# Altium PCB Mega16_SMT.PcbDoc (part 2 of 2)
Units mil, origin at the board's own origin, x right, y up, seen from the top; angles counter-clockwise.
Board outline 3000 x 4260 mil, 2 copper layers (Top Layer, Bottom Layer); 58 components, 55 nets, 251 pads, 26 vias.
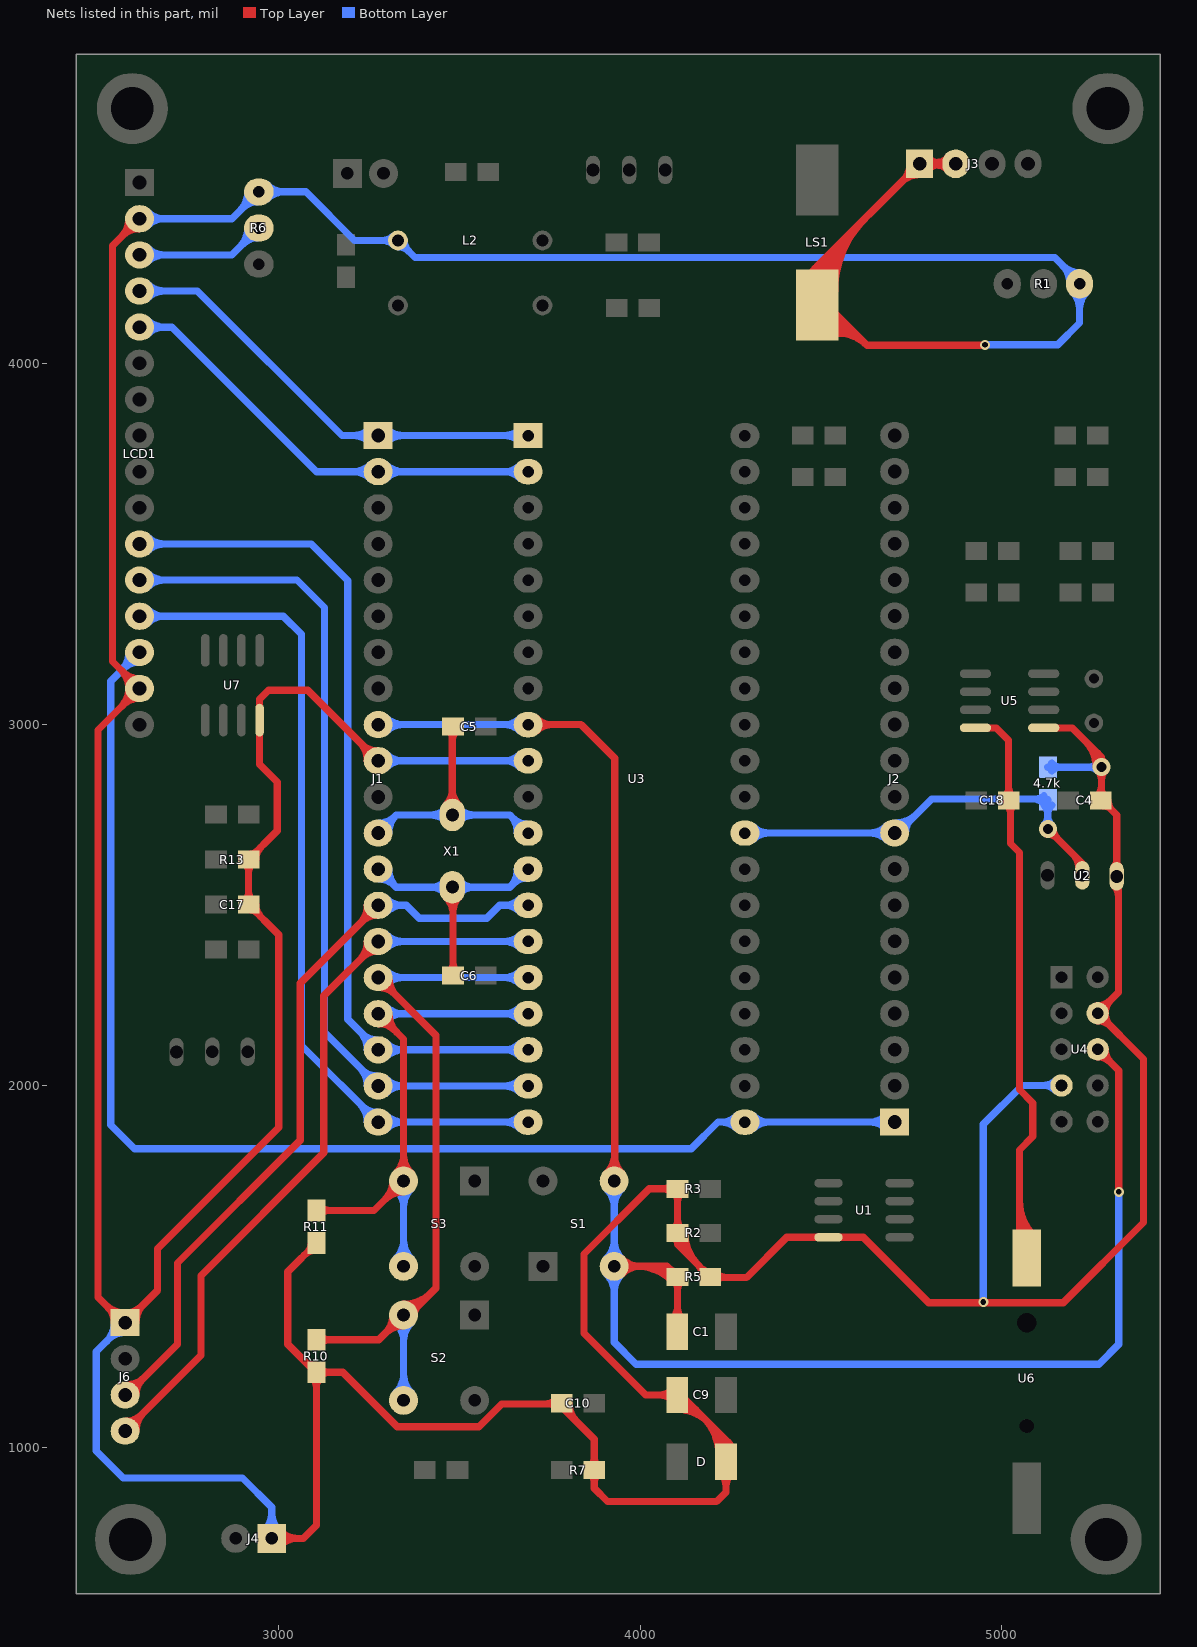
[diagram p2: the nets of this part, all layers, seen from the top]

## Via types
v1: diameter 28, hole 16, Top Layer to Bottom Layer, 22 vias
v2: diameter 50, hole 28, Top Layer to Bottom Layer, tented both sides, 2 vias
v3: diameter 50, hole 30, Top Layer to Bottom Layer, 2 vias

## Nets (pads, with @x,y where several pads share a name; then routed paths per layer and width w, separated by ;. In a path a pad name is that pad's centre, name@x,y a point inside that pad or via, vN(x,y) a via of type N, cw(c..) or ccw(c..) an arc to the next point about the centre after c; other vN are vias at no path point) (continued)
PC7: 4.7k.1 J2.9 U2.2 U3.29 | length 1699.1
  Top Layer w20: v2@5128.6,2696.4 cw(c5128.6,2660.19) 5154.21,2685.79 cw(c5179.81,2711.4) v2@5143.6,2711.4 ; v2(5128.6,2711.4) 5224,2616 U2.2@5224,2583 ; 5198.05,2641.95 cw(c5158.79,2602.68) U2.2@5214.31,2602.68
  Bottom Layer w20: U3.29@4290.37,2700 J2.9@4704.64,2700 ; U3.29@4313.05,2682.32 cw(c4355.73,2639.64) 4355.73,2700 cw(c4355.73,2760.36) U3.29@4313.05,2717.68 ; 4634.78,2700 ccw(c4634.78,2767.76) J2.9@4682.7,2719.85 ; 4636.72,2700 cw(c4636.72,2634.98) J2.9@4682.7,2680.96 ; J2.9@4704.64,2700.4 4713.4,2700.4 4807.36,2794.36 4.7k.1@5126.6,2794.36 ; J2.9@4707.14,2727.9 ccw(c4707.14,2809.41) 4764.77,2751.77 ; J2.9@4734.64,2700.4 cw(c4785.92,2700.4) 4749.66,2736.66 ; 5087.56,2794.36 cw(c5087.56,2751.32) 4.7k.1@5117.99,2781.75 ; 5097.22,2794.36 ccw(c5097.22,2823.74) 4.7k.1@5117.99,2802.96 ; v2@5117.99,2722.01 ccw(c5092.39,2747.61) 5128.6,2747.61 ccw(c5164.81,2747.61) v2@5139.21,2722.01 ; 4.7k.1@5117.99,2776.75 cw(c5092.39,2751.14) 5128.6,2751.14 cw(c5164.81,2751.14) 4.7k.1@5139.21,2776.75 ; v2(5128.6,2711.4) 4.7k.1@5128.6,2792.36 4.7k.1@5128.96,2792
PD2: J1.16 R10.1 S2.2 S2.3 U3.16 | length 2830.5
  Top Layer w20: R10.1@3104.6,1297.64 3277.11,1297.64 S2.2@3345.57,1366.11 3361.11,1366.11 3435,1440 3435,2140.36 J1.16@3275.36,2300 ; R10.1@3115.2,1287.04 cw(c3140.81,1261.43) 3140.81,1297.64 cw(c3140.81,1333.86) R10.1@3115.2,1308.25 ; J1.16@3277.86,2272.5 cw(c3277.86,2212.14) 3320.54,2254.82 ; J1.16@3305.36,2300 ccw(c3377.78,2300) 3326.57,2248.79 ; S2.2@3315.57,1366.11 cw(c3243.15,1366.11) 3294.36,1314.9 cw(c3345.57,1263.68) S2.2@3345.57,1336.11 ; S2.2@3345.57,1376.11 ccw(c3345.57,1437.76) 3389.17,1394.17 ; S2.2@3345.57,1396.11 ccw(c3345.57,1506.05) 3423.31,1428.31 ; S2.2@3375.57,1366.11 cw(c3410.49,1366.11) 3385.8,1390.8
  Bottom Layer w20: J1.16@3275.36,2300 U3.16@3690.37,2300 ; J1.16@3297.3,2280.55 cw(c3344.25,2233.61) 3344.25,2300 cw(c3344.25,2366.39) J1.16@3297.3,2319.45 ; S2.3@3324.36,1151.1 ccw(c3273.15,1202.32) 3345.57,1202.32 ccw(c3418,1202.32) S2.3@3366.79,1151.1 ; S2.2@3324.36,1344.9 cw(c3273.15,1293.68) 3345.57,1293.68 cw(c3418,1293.68) S2.2@3366.79,1344.9 ; S2.3@3345.57,1129.89 S2.2@3345.57,1366.11 ; U3.16@3667.69,2282.32 ccw(c3625.01,2239.64) 3625.01,2300 ccw(c3625.01,2360.36) U3.16@3667.69,2317.68
PD3: J1.17 R11.1 S3.2 S3.3 U3.17 | length 2233.3
  Top Layer w20: R11.1@3104.6,1655.64 3264.11,1655.64 S3.2@3345.57,1737.11 3345.57,2129.78 J1.17@3275.36,2200 ; R11.1@3115.2,1645.04 cw(c3140.81,1619.43) 3140.81,1655.64 cw(c3140.81,1691.86) R11.1@3115.2,1666.25 ; J1.17@3277.86,2172.5 cw(c3277.86,2112.14) 3320.54,2154.82 ; J1.17@3305.36,2200 ccw(c3377.78,2200) 3326.57,2148.79 ; S3.2@3315.57,1737.11 cw(c3243.15,1737.11) 3294.36,1685.9 cw(c3345.57,1634.68) S3.2@3345.57,1707.11 ; S3.2@3324.36,1758.32 ccw(c3273.15,1809.54) 3345.57,1809.54 ccw(c3418,1809.54) S3.2@3366.79,1758.32
  Bottom Layer w20: J1.17@3275.36,2200 U3.17@3690.37,2200 ; J1.17@3297.3,2180.55 cw(c3344.25,2133.61) 3344.25,2200 cw(c3344.25,2266.39) J1.17@3297.3,2219.45 ; S3.3@3324.36,1522.1 ccw(c3273.15,1573.32) 3345.57,1573.32 ccw(c3418,1573.32) S3.3@3366.79,1522.1 ; S3.2@3324.36,1715.9 cw(c3273.15,1664.68) 3345.57,1664.68 cw(c3418,1664.68) S3.2@3366.79,1715.9 ; S3.3@3345.57,1500.89 S3.2@3345.57,1737.11 ; U3.17@3667.69,2182.32 ccw(c3625.01,2139.64) 3625.01,2200 ccw(c3625.01,2260.36) U3.17@3667.69,2217.68
PD4: J1.18 LCD1.11 U3.18 | length 2774.5
  Bottom Layer w20: LCD1.11@2615,3500 3090,3500 3191,3399 3191,2184.36 J1.18@3275.36,2100 U3.18@3690.37,2100 ; LCD1.11@2636.95,3480.55 cw(c2683.89,3433.61) 2683.89,3500 cw(c2683.89,3566.39) LCD1.11@2636.95,3519.45 ; 3224.14,2151.21 cw(c3172.93,2100) J1.18@3245.36,2100 ; 3230.18,2145.18 ccw(c3272.86,2187.86) J1.18@3272.86,2127.5 ; J1.18@3297.3,2080.55 cw(c3344.25,2033.61) 3344.25,2100 cw(c3344.25,2166.39) J1.18@3297.3,2119.45 ; U3.18@3667.69,2082.32 ccw(c3625.01,2039.64) 3625.01,2100 ccw(c3625.01,2160.36) U3.18@3667.69,2117.68
PD5: J1.19 LCD1.12 U3.19 | length 2751.6
  Bottom Layer w20: LCD1.12@2615,3400 3051,3400 3127,3324 3127,2148.36 J1.19@3275.36,2000 U3.19@3690.37,2000 ; LCD1.12@2636.95,3380.55 cw(c2683.89,3333.61) 2683.89,3400 cw(c2683.89,3466.39) LCD1.12@2636.95,3419.45 ; 3224.14,2051.21 cw(c3172.93,2000) J1.19@3245.36,2000 ; 3230.18,2045.18 ccw(c3272.86,2087.86) J1.19@3272.86,2027.5 ; J1.19@3297.3,1980.55 cw(c3344.25,1933.61) 3344.25,2000 cw(c3344.25,2066.39) J1.19@3297.3,2019.45 ; U3.19@3667.69,1982.32 ccw(c3625.01,1939.64) 3625.01,2000 ccw(c3625.01,2060.36) U3.19@3667.69,2017.68
PD6: J1.20 LCD1.13 U3.20 | length 2729.3
  Bottom Layer w20: LCD1.13@2615,3300 3013,3300 3063,3250 3063,2112.36 J1.20@3275.36,1900 U3.20@3690.37,1900 ; LCD1.13@2636.95,3280.55 cw(c2683.89,3233.61) 2683.89,3300 cw(c2683.89,3366.39) LCD1.13@2636.95,3319.45 ; 3224.14,1951.21 cw(c3172.93,1900) J1.20@3245.36,1900 ; 3230.18,1945.18 ccw(c3272.86,1987.86) J1.20@3272.86,1927.5 ; J1.20@3297.3,1880.55 cw(c3344.25,1833.61) 3344.25,1900 cw(c3344.25,1966.39) J1.20@3297.3,1919.45 ; U3.20@3667.69,1882.32 ccw(c3625.01,1839.64) 3625.01,1900 ccw(c3625.01,1960.36) U3.20@3667.69,1917.68
PD7: J2.1 LCD1.14 U3.21 | length 3967
  Bottom Layer w20: 2563.79,3148.79 ccw(c2512.57,3200) LCD1.14@2585,3200 ; 2569.82,3154.82 cw(c2612.5,3112.14) LCD1.14@2612.5,3172.5 ; LCD1.14@2615,3200 2535,3120 2535,1892 2601,1826 4142,1826 4216,1900 U3.21@4290.37,1900 J2.1@4704.64,1900 ; U3.21@4267.69,1882.32 ccw(c4225.01,1839.64) 4225.01,1900 ccw(c4225.01,1960.36) U3.21@4267.69,1917.68 ; U3.21@4313.05,1882.32 cw(c4355.73,1839.64) 4355.73,1900 cw(c4355.73,1960.36) U3.21@4313.05,1917.68 ; 4634.78,1900 ccw(c4634.78,1967.76) J2.1@4682.7,1919.85 ; 4636.72,1900 cw(c4636.72,1834.98) J2.1@4682.7,1880.96
RD: J1.2 LCD1.5 U3.2 | length 1648.7
  Bottom Layer w20: LCD1.5@2615,4100 2705,4100 3105,3700 J1.2@3275.36,3700 U3.2@3690.37,3700 ; LCD1.5@2636.95,4080.55 cw(c2683.89,4033.61) 2683.89,4100 cw(c2683.89,4166.39) LCD1.5@2636.95,4119.45 ; J1.2@3253.41,3680.55 ccw(c3206.47,3633.61) 3206.47,3700 ccw(c3206.47,3766.39) J1.2@3253.41,3719.45 ; J1.2@3297.3,3680.55 cw(c3344.25,3633.61) 3344.25,3700 cw(c3344.25,3766.39) J1.2@3297.3,3719.45 ; U3.2@3667.69,3682.32 ccw(c3625.01,3639.64) 3625.01,3700 ccw(c3625.01,3760.36) U3.2@3667.69,3717.68
RESET: C1.1 J1.9 R5.1 S1.2 S1.3 U3.9 U4.6 | length 6254.4
  Top Layer w20: U3.9@3690.37,3000 3837,3000 3930,2907 S1.3@3930,1737.11 ; U3.9@3713.05,2982.32 cw(c3755.73,2939.64) 3755.73,3000 cw(c3755.73,3060.36) U3.9@3713.05,3017.68 ; S1.3@3907.21,1758.32 ccw(c3852.2,1813.34) 3930,1813.34 ; 3930,1805.74 ccw(c3997.05,1805.74) S1.3@3949.64,1758.32 ; S1.2@3942.54,1515 S1.2@3928.43,1500.89 4074.65,1500.89 ; S1.2@3949.64,1479.68 cw(c4000.85,1428.46) 4000.85,1500.89 cw(c4000.85,1573.32) S1.2@3949.64,1522.1 ; 3992.01,1500.89 cw(c3992.01,1364.67) R5.1@4088.33,1460.99 ; 4040.3,1500.89 cw(c4040.3,1412.96) R5.1@4102.47,1475.14 ; R5.1@4081.87,1493.67 ccw(c4098.94,1510.74) R5.1@4098.94,1486.6 ; R5.1@4084.05,1473.46 ccw(c4051.32,1477.57) 4074.65,1500.89 ; C1.1@4088.86,1354.14 ccw(c4052.45,1390.55) 4103.94,1390.55 ; R5.1@4093.33,1460.99 cw(c4067.72,1435.39) 4103.94,1435.39 cw(c4140.15,1435.39) R5.1@4114.54,1460.99 ; C1.1@4103,1320 4103.94,1320.94 R5.1@4103.94,1471.6 4074.65,1500.89 ; 4103.94,1386.02 ccw(c4149.02,1386.02) C1.1@4117.14,1354.14 ; U4.6@5266.36,2080.4 cw(c5266.36,2029.7) 5302.21,2065.55 cw(c5338.06,2101.4) U4.6@5287.36,2101.4 ; U4.6@5266.36,2101.4 5325,2042.76 v1(5325,1707)
  Bottom Layer w20: J1.9@3275.36,3000 U3.9@3690.37,3000 ; J1.9@3297.3,2980.55 cw(c3344.25,2933.61) 3344.25,3000 cw(c3344.25,3066.39) J1.9@3297.3,3019.45 ; U3.9@3667.69,2982.32 ccw(c3625.01,2939.64) 3625.01,3000 ccw(c3625.01,3060.36) U3.9@3667.69,3017.68 ; S1.2@3907.21,1479.68 cw(c3856,1428.46) 3928.43,1428.46 cw(c4000.85,1428.46) S1.2@3949.64,1479.68 ; S1.2@3907.21,1522.1 ccw(c3856,1573.32) 3928.43,1573.32 ccw(c4000.85,1573.32) S1.2@3949.64,1522.1 ; S1.3@3907.21,1715.9 cw(c3856,1664.68) 3928.43,1664.68 cw(c4000.85,1664.68) S1.3@3949.64,1715.9 ; S1.3@3928.43,1737.11 S1.2@3928.43,1500.89 3928.43,1290.57 3989,1230 5270,1230 5325,1285 v1(5325,1707)
RS: J1.1 LCD1.4 U3.1 | length 1648.7
  Bottom Layer w20: LCD1.4@2615,4200 2775,4200 3175,3800 J1.1@3275.36,3800 U3.1@3690.37,3800 ; LCD1.4@2636.95,4180.55 cw(c2683.89,4133.61) 2683.89,4200 cw(c2683.89,4266.39) LCD1.4@2636.95,4219.45 ; J1.1@3253.41,3780.55 ccw(c3206.47,3733.61) 3206.47,3800 ccw(c3206.47,3866.39) J1.1@3253.41,3819.45 ; J1.1@3297.3,3780.55 cw(c3344.25,3733.61) 3344.25,3800 cw(c3344.25,3866.39) J1.1@3297.3,3819.45 ; U3.1@3667.69,3782.32 ccw(c3625.01,3739.64) 3625.01,3800 ccw(c3625.01,3860.36) U3.1@3667.69,3817.68
RXD: J1.14 J6.3 U3.14 | length 2468.5
  Top Layer w20: J6.3@2577.63,1172.57 ccw(c2577.63,1244.86) 2628.74,1193.74 ; J6.3@2599.1,1164.1 2720,1285 2720,1510 3060,1850 3060,2284.64 J1.14@3275.36,2500 ; J6.3@2605.13,1145.07 cw(c2665.63,1145.07) 2622.85,1187.85 ; 3224.14,2448.79 ccw(c3172.93,2500) J1.14@3245.36,2500 ; 3230.18,2454.82 cw(c3272.86,2412.14) J1.14@3272.86,2472.5
  Bottom Layer w20: J1.14@3275.36,2500 3353,2500 3389,2464 3576,2464 3612,2500 U3.14@3690.37,2500 ; J1.14@3297.3,2480.55 cw(c3344.25,2433.61) 3344.25,2500 cw(c3344.25,2566.39) J1.14@3297.3,2519.45 ; U3.14@3667.69,2482.32 ccw(c3625.01,2439.64) 3625.01,2500 ccw(c3625.01,2560.36) U3.14@3667.69,2517.68
TXD: J1.15 J6.4 U3.15 | length 2437.2
  Top Layer w20: J6.4@2577.63,1072.57 ccw(c2577.63,1132.78) 2620.21,1090.21 ; J6.4@2596.6,1066.6 2785,1255 2785,1475 3125,1815 3125,2249.64 J1.15@3275.36,2400 ; J6.4@2605.13,1045.07 cw(c2677.7,1045.07) 2626.38,1096.38 ; 3224.14,2348.79 ccw(c3172.93,2400) J1.15@3245.36,2400 ; 3230.18,2354.82 cw(c3272.86,2312.14) J1.15@3272.86,2372.5
  Bottom Layer w20: J1.15@3275.36,2400 U3.15@3690.37,2400 ; J1.15@3297.3,2380.55 cw(c3344.25,2333.61) 3344.25,2400 cw(c3344.25,2466.39) J1.15@3297.3,2419.45 ; U3.15@3667.69,2382.32 ccw(c3625.01,2339.64) 3625.01,2400 ccw(c3625.01,2460.36) U3.15@3667.69,2417.68
VCC: 4.7k.2 C4.2 C9.1 C10.1 C17.2 D.2 J1.10 J3.1 J3.2 J4.1 J6.1 L2.2 LCD1.2 LCD1.15 LS1.1 R1.1 R2.1 R3.2 R5.2 R6.1 R7.1 R10.2 R11.2 R13.1 U1.8 U2.3 U3.10 U4.4 U4.7 U5.1 U7.8 | length 25029.1
  Top Layer w20: 2521.07,1393.93 ccw(c2572.63,1445.48) J6.1@2572.63,1372.57 ; 2527.59,1387.41 cw(c2485.26,1345.07) J6.1@2545.13,1345.07 ; 2563.79,3048.79 ccw(c2512.57,3100) 2585,3100 ccw(c2512.57,3100) 2563.79,3151.21 ; 2563.79,4348.79 ccw(c2512.57,4400) LCD1.2@2585,4400 ; 2569.82,3054.82 cw(c2612.5,3012.14) LCD1.15@2612.5,3072.5 ; 2569.82,3145.18 ccw(c2612.5,3187.86) LCD1.15@2612.5,3127.5 ; 2569.82,4354.82 cw(c2612.5,4312.14) LCD1.2@2612.5,4372.5 ; J6.1@2572.53,1342.47 2500,1415 2500,2985 LCD1.15@2615,3100 2540,3175 2540,4325 LCD1.2@2615,4400 ; J6.1@2575.13,1345.07 2665,1434.94 2665,1550 3000,1885 3000,2418.82 C17.2@2916.75,2502.07 R13.1@2916.75,2626.73 2996,2705.99 2996,2841 2947,2890 U7.8@2947,3012.54 2947,3070 2972,3095 3080.36,3095 J1.10@3275.36,2900 ; J6.1@2577.63,1372.57 ccw(c2577.63,1432.93) 2620.31,1390.25 ; J6.1@2605.13,1345.07 cw(c2677.56,1345.07) 2626.34,1396.28 ; C17.2@2906.14,2512.67 ccw(c2880.53,2538.28) 2916.75,2538.28 ccw(c2952.96,2538.28) C17.2@2927.35,2512.67 ; R13.1@2906.14,2616.13 cw(c2880.53,2590.52) 2916.75,2590.52 cw(c2952.96,2590.52) R13.1@2927.35,2616.13 ; C17.2@2921.75,2487.07 cw(c2921.75,2462.93) C17.2@2938.82,2480 ; R13.1@2921.75,2641.73 ccw(c2921.75,2665.88) R13.1@2938.82,2648.81 ; C17.2@2936.75,2502.07 ccw(c2985.03,2502.07) 2950.89,2467.93 ; R13.1@2936.75,2626.73 cw(c2985.03,2626.73) 2950.89,2660.88 ; J4.1@2980.75,748 3068,748 3104.6,784.6 R10.2@3104.6,1207.64 ; J4.1@3001.96,726.79 cw(c3053.17,675.57) 3053.17,748 cw(c3053.17,820.43) J4.1@3001.96,769.21 ; 3066.63,1243.37 ccw(c3104.6,1281.33) R10.2@3104.6,1227.64 ; 3070.46,1531.5 cw(c3104.6,1497.36) R11.2@3104.6,1545.64 ; R11.2@3082.53,1543.57 ccw(c3065.46,1560.64) R11.2@3089.6,1560.64 ; R10.2@3093.99,1192.04 cw(c3068.38,1166.43) 3104.6,1166.43 cw(c3140.81,1166.43) R10.2@3115.2,1192.04 ; R11.2@3104.6,1549.6 R11.2@3104.6,1565.64 3025,1486.04 3025,1285 3102.36,1207.64 R10.2@3104.6,1207.64 ; R10.2@3115.2,1197.04 cw(c3140.81,1171.43) 3140.81,1207.64 cw(c3140.81,1243.86) R10.2@3115.2,1218.25 ; 3224.14,2951.21 cw(c3172.93,2900) J1.10@3245.36,2900 ; 3230.18,2945.18 ccw(c3272.86,2987.86) J1.10@3272.86,2927.5 ; 3737.38,1120 ccw(c3737.38,1163.26) C10.1@3767.97,1132.67 ; 3747.34,1120 cw(c3747.34,1090.83) C10.1@3767.97,1111.46 ; C10.1@3783.58,1122.06 3783.58,1112.42 3873.58,1022.42 R7.1@3873.58,937.06 3873.58,886.42 3910,850 4212,850 4238,876 D.2@4238,960 4238,1020 ; C10.1@3783.58,1127.06 3776.51,1120 3617.39,1120 3554.39,1057 3328,1057 3177.36,1207.64 R10.2@3104.6,1207.64 ; C10.1@3803.58,1122.06 ccw(c3875.13,1122.06) 3824.53,1071.47 ; R7.1@3862.97,926.46 cw(c3837.36,900.85) 3873.58,900.85 cw(c3909.79,900.85) R7.1@3884.18,926.46 ; R7.1@3862.97,947.67 ccw(c3837.36,973.28) 3873.58,973.28 ccw(c3909.79,973.28) R7.1@3884.18,947.67 ; R3.2@4088.33,1704.8 ccw(c4062.72,1679.19) 4062.72,1715.4 ccw(c4062.72,1751.62) R3.2@4088.33,1726.01 ; C9.1@4088.86,1130.86 ccw(c4054.72,1096.72) 4054.72,1145 ccw(c4054.72,1193.28) C9.1@4088.86,1159.14 ; R2.1@4093.33,1604.11 ccw(c4067.72,1629.71) 4103.94,1629.71 ccw(c4140.15,1629.71) R2.1@4114.54,1604.11 ; R3.2@4093.33,1704.8 cw(c4067.72,1679.19) 4103.94,1679.19 cw(c4140.15,1679.19) R3.2@4114.54,1704.8 ; R2.1@4094.37,1581.95 cw(c4077.52,1561.6) 4103.94,1561.6 ; C9.1@4103,1105 cw(c4103,984.29) 4188.36,1069.64 ; C9.1@4103,1125 cw(c4103,1052.57) 4154.21,1103.79 ; R2.1@4113.5,1581.95 ccw(c4130.36,1561.6) 4103.94,1561.6 ; R2.1@4123.94,1593.5 ccw(c4249.24,1593.5) 4160.64,1504.9 ; 4126.49,1539.04 cw(c4180.95,1593.5) R2.1@4103.94,1593.5 ; 4159.79,1505.74 cw(c4125.65,1471.6) R5.2@4173.94,1471.6 ; R5.2@4171.87,1493.67 ccw(c4188.94,1510.74) R5.2@4188.94,1486.6 ; 4175.57,1082.43 cw(c4073.15,980) D.2@4218,980 ; R5.2@4209.54,1460.99 cw(c4231.29,1439.25) 4231.29,1470 ; R5.2@4209.54,1482.21 ccw(c4239.01,1511.68) 4239.01,1470 ; 4209.72,1048.28 cw(c4141.43,980) D.2@4238,980 ; D.2@4223.86,925.86 cw(c4189.72,891.72) 4238,891.72 cw(c4286.28,891.72) D.2@4252.14,925.86 ; D.2@4226,996 ccw(c4208,1020) 4238,1020 ; 4243.86,1014.14 cw(c4209.72,980) D.2@4258,980 ; D.2@4250,996 cw(c4268,1020) 4238,1020 ; LS1.1@4459.06,4200.54 cw(c4547.69,4200.54) 4485.01,4263.22 ; LS1.1@4474.75,4247.17 ccw(c4467.87,4268.2) 4490,4268.2 ; LS1.1@4479.06,4200.54 cw(c4615.97,4200.54) 4519.16,4297.36 ; LS1.1@4486.12,4132.04 cw(c4511.56,4064.88) 4562.34,4115.66 ; LS1.1@4493.21,4113.34 cw(c4523.58,4033.13) 4584.23,4093.77 ; LS1.1@4499.06,4200.54 cw(c4684.25,4200.54) 4553.3,4331.5 ; LS1.1@4500.29,4094.63 cw(c4535.6,4001.38) 4606.11,4071.89 ; LS1.1@4505.25,4247.17 cw(c4512.13,4268.2) 4490,4268.2 ; LS1.1@4507.37,4075.93 cw(c4547.63,3969.63) 4628,4050 ; LS1.1@4519.06,4200.54 cw(c4752.54,4200.54) 4587.44,4365.64 ; LS1.1@4539.06,4200.54 cw(c4820.82,4200.54) 4621.58,4399.78 ; 4722.72,4500.92 cw(c4773.93,4449.7) J3.1@4773.93,4522.13 ; 4728.75,4506.95 ccw(c4686.07,4549.63) J3.1@4746.43,4549.63 ; J3.1@4793.37,4532.68 cw(c4840.32,4485.74) 4840.32,4552.13 cw(c4840.32,4618.52) J3.1@4793.37,4571.58 ; 4825.72,4548.22 cw(c4830.98,4528.58) J3.2@4849.24,4537.53 ; 4825.72,4556.04 ccw(c4830.98,4575.68) J3.2@4849.24,4566.73 ; 4832.84,4550.13 ccw(c4825.48,4577.6) J3.2@4850.11,4563.38 ; 4832.84,4554.13 cw(c4825.48,4526.66) J3.2@4850.11,4540.88 ; J3.2@4854.48,4532.68 ccw(c4807.54,4485.74) 4807.54,4552.13 ccw(c4807.54,4618.52) J3.2@4854.48,4571.58 ; J3.2@4873.93,4552.13 J3.1@4773.93,4552.13 4490,4268.2 ; 4935.51,1400 ccw(c4935.51,1416.49) v1@4947.17,1404.83 ; v1@4952.83,1404.83 ccw(c4964.49,1416.49) 4964.49,1400 ; v1@4955,4050 4628,4050 ; U5.1@5117.13,2991 5196,2991 5277,2910 ; 5232.3,2954.7 cw(c5160.6,2883) v2@5262,2883 ; C4.2@5264.75,2801.21 ccw(c5235.18,2830.78) 5277,2830.78 ; U4.4@5266.36,2180.4 cw(c5266.36,2129.7) 5302.21,2165.55 cw(c5338.06,2201.4) 5287.36,2201.4 cw(c5338.06,2201.4) 5302.21,2237.25 cw(c5266.36,2273.1) U4.4@5266.36,2222.4 ; v2@5266.39,2872.39 cw(c5240.79,2846.79) 5277,2846.79 cw(c5313.21,2846.79) v2@5287.61,2872.39 ; 5266.44,2920.56 cw(c5228.89,2883) v2@5282,2883 ; v2@5269.08,2895.74 ccw(c5260.2,2910) 5277,2910 ; 5277,2822.85 ccw(c5307.61,2822.85) C4.2@5285.96,2801.21 ; C4.2@5280.36,2775.6 cw(c5280.36,2743.53) C4.2@5303.04,2766.21 ; v2@5284.92,2895.74 cw(c5293.8,2910) 5277,2910 ; C4.2@5295.36,2790.6 ccw(c5335.71,2790.6) 5307.18,2762.06 ; U2.3@5312.15,2553.47 cw(c5283.55,2524.86) 5324,2524.86 ; U2.3@5312.15,2606.53 ccw(c5295.62,2623.07) 5319,2623.07 ccw(c5342.38,2623.07) U2.3@5325.85,2606.53 ; U2.3@5319,2580 5319,2750.24 5277,2792.24 v2(5277,2883) 5277,2910 ; U2.3@5324,2544 5324,2259.04 U4.4@5266.36,2201.4 5393,2074.76 5393,1622 5171,1400 4799,1400 4617.83,1581.17 U1.8@4521.57,1581.17 4406.17,1581.17 4295,1470 4195.54,1470 R5.2@4193.94,1471.6 4103.94,1561.6 ; 4103.94,1561.6 R2.1@4103.94,1593.5 ; R2.1@4103.94,1593.5 R3.2@4103.94,1715.4 4025.4,1715.4 3845,1535 3845,1316 4016,1145 C9.1@4103,1145 4113,1145 4238,1020 ; 4490,4268.2 LS1.1@4490,4161.17 4516.83,4161.17 4628,4050
  Bottom Layer w20: 2523.92,1293.86 ccw(c2472.7,1345.07) J6.1@2545.13,1345.07 ; 2529.95,1299.89 cw(c2572.63,1257.22) J6.1@2572.63,1317.57 ; J6.1@2575.13,1345.07 2495,1264.94 2495,990 2570,915 2900,915 2980.75,834.25 J4.1@2980.75,748 ; LCD1.2@2615,4400 2870.84,4400 R6.1@2945.24,4474.4 3075.6,4474.4 3210,4340 L2.2@3330,4340 3377.56,4292.44 5147.56,4292.44 5216.36,4223.64 R1.1@5216.36,4219.76 5216.36,4111.36 5156,4051 v1@4958,4051 ; LCD1.2@2636.95,4380.55 cw(c2683.89,4333.61) 2683.89,4400 cw(c2683.89,4466.39) LCD1.2@2636.95,4419.45 ; 2892.32,4421.48 ccw(c2839.4,4474.4) R6.1@2914.24,4474.4 ; 2900.77,4429.93 cw(c2941.74,4388.96) R6.1@2941.74,4446.9 ; J4.1@2959.53,769.21 ccw(c2908.32,820.43) 2980.75,820.43 ccw(c3053.17,820.43) J4.1@3001.96,769.21 ; R6.1@2968.19,4454.96 cw(c3015.13,4408.01) 3015.13,4474.4 cw(c3015.13,4540.79) R6.1@2968.19,4493.85 ; J1.10@3275.36,2900 U3.10@3690.37,2900 ; J1.10@3297.3,2880.55 cw(c3344.25,2833.61) 3344.25,2900 cw(c3344.25,2966.39) J1.10@3297.3,2919.45 ; L2.2@3317.58,4327.58 ccw(c3287.61,4297.61) 3287.61,4340 ccw(c3287.61,4382.39) L2.2@3317.58,4352.42 ; L2.2@3330,4322.44 cw(c3330,4280.05) 3359.98,4310.02 cw(c3389.95,4340) L2.2@3347.56,4340 ; U3.10@3667.69,2882.32 ccw(c3625.01,2839.64) 3625.01,2900 ccw(c3625.01,2960.36) U3.10@3667.69,2917.68 ; v1(4950,1402) 4950,1894 5057.4,2001.4 U4.7@5166.36,2001.4 ; 4.7k.2@5128.6,2882.36 v2@5276.36,2882.36 ; 4.7k.2@5139.21,2871.75 cw(c5164.81,2846.14) 5164.81,2882.36 cw(c5164.81,2918.57) 4.7k.2@5139.21,2892.96 ; U4.7@5151.51,1986.55 ccw(c5115.66,1950.7) 5115.66,2001.4 ccw(c5115.66,2052.1) U4.7@5151.51,2016.25 ; 5169.14,4270.86 cw(c5121.54,4223.26) R1.1@5188.86,4223.26 ; 5170.07,4269.93 ccw(c5216.36,4316.22) R1.1@5216.36,4250.76 ; R1.1@5196.91,4196.81 cw(c5149.97,4149.87) 5216.36,4149.87 cw(c5282.75,4149.87) R1.1@5235.8,4196.81 ; 5239.24,2882.36 ccw(c5239.24,2920.76) v2@5266.39,2893.61 ; 5242.34,2882.36 cw(c5242.34,2848.34) v2@5266.39,2872.39
  other v1: 4955,4051
VO: LCD1.3 R6.2 | length 569.6
  Bottom Layer w20: LCD1.3@2615,4300 2870.84,4300 R6.2@2945.24,4374.4 ; LCD1.3@2636.95,4280.55 cw(c2683.89,4233.61) 2683.89,4300 cw(c2683.89,4366.39) LCD1.3@2636.95,4319.45 ; 2892.32,4321.48 ccw(c2839.4,4374.4) R6.2@2914.24,4374.4 ; 2900.77,4329.93 cw(c2941.74,4288.96) R6.2@2941.74,4346.9
WVCC: C18.1 U5.8 U6.1 | length 1897.2
  Top Layer w20: U5.8@4928.15,2991 4986,2991 5020,2957 5020,2780 5025,2775 5025,2671 5050,2646 5050,1990 5087,1953 5087,1860 5050,1823 5050,1574 U6.1@5100,1524 ; C18.1@5009.75,2801.21 ccw(c4985.01,2825.95) 5020,2825.95 ; C18.1@5014.75,2779.99 cw(c4990.01,2755.25) 5025,2755.25 ; 5020,2827.68 ccw(c5057.44,2827.68) C18.1@5030.96,2801.21 ; 5025,2753.52 cw(c5062.44,2753.52) C18.1@5035.96,2779.99 ; 5050,1634.28 ccw(c5140.91,1634.28) U6.1@5076.63,1570 ; 5050,1682.56 ccw(c5189.19,1682.56) U6.1@5090.77,1584.14
XTAL1: C6.2 J1.13 U3.13 X1.1 | length 1238.2
  Top Layer w20: X1.1@3462.97,2522.32 cw(c3415.47,2474.82) 3482.64,2474.82 ; C6.2@3472.04,2316.01 ccw(c3446.43,2341.62) 3482.64,2341.62 ccw(c3518.86,2341.62) C6.2@3493.25,2316.01 ; X1.1@3480.64,2550 3482.64,2548 C6.2@3482.64,2305.4 ; 3482.64,2484.47 cw(c3536.18,2484.47) X1.1@3498.32,2522.32
  Bottom Layer w20: J1.13@3275.36,2600 3325.36,2550 ; J1.13@3277.86,2572.5 cw(c3277.86,2512.14) 3320.54,2554.82 ; J1.13@3305.35,2599.52 ccw(c3373.67,2598.32) 3325.36,2550 ; X1.1@3462.97,2532.32 ccw(c3420.29,2489.64) 3420.29,2550 ccw(c3420.29,2610.36) X1.1@3462.97,2567.68 ; X1.1@3498.32,2532.32 cw(c3541,2489.64) 3541,2550 cw(c3541,2610.36) X1.1@3498.32,2567.68 ; 3651.23,2560.86 cw(c3685.37,2526.72) U3.13@3685.37,2575 ; U3.13@3660.37,2599.55 cw(c3592.06,2598.32) 3640.37,2550 ; U3.13@3690.37,2600 3640.37,2550 ; 3325.36,2550 X1.1@3480.64,2550 3640.37,2550
XTAL2: C5.2 J1.12 U3.12 X1.2 | length 1238
  Top Layer w20: X1.2@3462.97,2777.68 ccw(c3420.29,2820.36) 3480.64,2820.36 ccw(c3541,2820.36) X1.2@3498.32,2777.68 ; C5.2@3472.04,2983.79 cw(c3451.25,2963.01) 3480.64,2963.01 ; X1.2@3480.64,2750 3480.64,2992.4 C5.2@3482.64,2994.4 ; 3480.64,2953.36 cw(c3523.68,2953.36) C5.2@3493.25,2983.79
  Bottom Layer w20: J1.12@3275.36,2700 3325.36,2750 ; J1.12@3277.86,2727.5 ccw(c3277.86,2787.86) 3320.54,2745.18 ; J1.12@3305.35,2700.48 cw(c3373.67,2701.68) 3325.36,2750 ; X1.2@3462.97,2732.32 ccw(c3420.29,2689.64) 3420.29,2750 ccw(c3420.29,2810.36) X1.2@3462.97,2767.68 ; X1.2@3498.32,2732.32 cw(c3541,2689.64) 3541,2750 cw(c3541,2810.36) X1.2@3498.32,2767.68 ; 3651.23,2739.14 ccw(c3685.37,2773.28) U3.12@3685.37,2725 ; U3.12@3660.37,2700.45 ccw(c3592.06,2701.68) 3640.37,2750 ; U3.12@3690.37,2700 3640.37,2750 ; 3325.36,2750 X1.2@3480.64,2750 3640.37,2750
pads on no net: LCD1.7 LCD1.8 LCD1.9 LCD1.10 U4.8 U6.3 U6.4 U7.4 U8.1

## Polygon pours and split planes (outlines as drawn)
GND on Top Layer "Top Layer-GNDC" (solid, remove dead copper, pour order 3): 2440,4855 5440,4855 5440,595 2440,595
GND on Bottom Layer "Bottom Layer-GNDC" (solid, remove dead copper, pour order 5): 2440,4855 5440,4855 5440,595 2440,595

## Keep-outs
Keep-Out Layer:
  the board outline again, w10

## Silkscreen, mask and mechanical layers (free items; w line width, h text height)
Top Overlay:
  rectangle: 5000,2051 5116,2152
  lines w8: 2664,893 3018,893 3018,1061 2664,1061 2664,893 ; 2665,1109 2665,1378 3019,1378 3019,1109 2665,1109 ; 2668,1431.89 3023,1431.89 3023,1882 2668,1882 2668,1431.89 ; 2735,3435 2735,4040 3010,4040 3010,3435 2735,3435 ; 4449,699.23 4449,1039.23 4784,1039.23 4784,699.23 4449,699.23
  lines w10: 2653.23,2036 cw(c2817,2036) 2980.77,2035 ; 3810.05,4477 cw(c3971,4475.94) 4131.95,4475 ; 5064.02,2521 cw(c5225,2520.97) 5385.98,2520.97 ; 5116,2073 5116,2053 5114,2051 5000,2051 5000,2152 5116.36,2152 5116.36,2131
  text "ATmega16 Demo" at 3522.88,4702 h70
  text "VCC" at 4735,4620 h30
  text "VCC" at 4837,4620 h30
  text "GND" at 4937,4620 h30
  text "GND" at 5038,4620 h30
  text "AOUT" at 3120,4421 h30
  text "AGND" at 3250,4421 h30
  text "PB3" at 4432,3982 h45
  text "LCD" at 2760,3979.29 h34
  text "RS-PB0" at 2760,3905 h34
  text "RD-PB1" at 2760,3830.71 h34
  text "PA0/ADC0" at 4790,3780.64 h40
  text "PB0" at 3096.65,3779.99 h40
  text "XCK/T0" at 3358.23,3779.76 h40
  text "EN-PB2" at 2760,3756.43 h34
  text "DB4-PD4" at 2760,3682.14 h34
  text "PB1" at 3109.97,3679.99 h40
  text "T1" at 3358.23,3676.76 h40
  text "PA1/ADC1" at 4790,3675.64 h40
  text "DB5-PD5" at 2760,3607.86 h34
  text "INT2/AIN0" at 3356.23,3584.76 h32
  text "PA2/ADC2" at 4364.97,3581.64 h32
  text "PB2" at 3096.65,3579.99 h40
  text "PA3" at 5186,3551 h40
  text "DB6-PD6" at 2760,3533.57 h34
  text "PA3/ADC3" at 4364.97,3481.94 h32
  text "PB3" at 3096.65,3479.99 h40
  text "OC0/AIN1" at 3356.23,3479.76 h32
  text "+" at 5092,3461 h40
  text "DB7-PD7" at 2760,3459.29 h34
  text "PA4/ADC4" at 4364.97,3382.23 h32
  text "PB4" at 3096.65,3379.99 h40
  text "SS" at 3358.23,3374.76 h40
  text "+" at 5093,3346 h40
  text "PA5/ADC5" at 4364.97,3282.53 h32
  text "PB5" at 3096.65,3280 h40
  text "MOSI" at 3358.23,3278.76 h40
  text "PA4" at 5186,3256 h40
  text "PA6/ADC6" at 4364.97,3182.82 h32
  text "PB6" at 3096.65,3180 h40
  text "MOSO" at 3358.23,3179.76 h40
  text "PA7/ADC7" at 4364.97,3083.11 h32
  text "PB7" at 3098.35,3080 h40
  text "SCK" at 3358.23,3078.76 h40
  text "RESET" at 3016.67,2980 h40
  text "AREF" at 4461.61,2974.41 h40
  text "VCC" at 3096.65,2880 h40
  text "AGND" at 4461.61,2874.7 h40
  text "GND" at 3096.65,2780 h40
  text "AVCC" at 4461.61,2775 h40
  text "XTAL2" at 3016.67,2680 h40
  text "TOSC2" at 4421.62,2675.29 h40
  text "PC7" at 4809.99,2673 h40
  text "XTAL1" at 3030,2580 h40
  text "TOSC1" at 4434.95,2575.58 h40
  text "PC6" at 4809.99,2573.25 h40
  text "PD0/RXD" at 2987.35,2478.01 h33
  text "TDI" at 4514.93,2475.88 h40
  text "PC5" at 4809.99,2473.5 h40
  text "PD1/TXD" at 2992.85,2378.01 h33
  text "TDO" at 4501.6,2376.17 h40
  text "PC4" at 4809.99,2373.75 h40
  text "PD2/INT0" at 2959.86,2279 h33
  text "TMS" at 4501.6,2276.47 h40
  text "PC3" at 4809.99,2274 h40
  text "INT1" at 3358.23,2179 h40
  text "PD3" at 3096.65,2177 h40
  text "TCK" at 4501.6,2176.76 h40
  text "PC2" at 4809.99,2174.25 h40
  text "OC1B" at 3358.23,2079 h40
  text "PD4" at 3096.65,2077 h40
  text "SDA" at 4501.6,2077.06 h40
  text "PC1" at 4809.99,2074.5 h40
  text "OC1A" at 3358.23,1979 h40
  text "PD5" at 3096.65,1977 h40
  text "SCL" at 4501.6,1977.35 h40
  text "PC0" at 4809.99,1974.75 h40
  text "ICP" at 3358.23,1879 h40
  text "OC2" at 4501.6,1877.64 h40
  text "PD6" at 3096.65,1877 h40
  text "PD7" at 4809.99,1875 h40
  text "TLC5615" at 2693,1810.89 h40
  text "DIN-PB5" at 2693,1722.39 h40
  text "SCLK-PB7" at 2693,1633.89 h40
  text "CS-PB4" at 2693,1545.39 h40
  text "OUT-AOUT" at 2692,1456.89 h40
  text "AT24C02" at 2685,1313.62 h36
  text "VCC" at 2505,1305 h30 r90
  text "SCL-PC0" at 2685,1224 h36
  text "GND" at 2505,1203.33 h30 r90
  text "SDA-PC1" at 2685,1134.38 h36
  text "RXD" at 2505,1101.67 h30 r90
  text "TXD" at 2505,1000 h30 r90
  text "DS18B20" at 2684,998 h36
  text "DS1302" at 4479,971.85 h36
  text "DQ-PC7" at 2684,920 h36
  text "+" at 3570,905 h60
  text "RST-PA5" at 4479,889.23 h36
  text "GND" at 2825,818 h34
  text "I/O-PA6" at 4479,806.62 h36
  text "SCLK-PA7" at 4479,724 h36
  text "Aug 30 2016" at 3645.34,707 h60
Mechanical 13:
  lines w3.97: 5065.29,2520 cw(c5224,2521) 5382.71,2521
  lines w8.7: 2654.41,2036 cw(c2817,2036) 2979.59,2035
  lines w10: 3809.39,4477 cw(c3970,4476) 4130.61,4475
Mechanical 15:
  lines w3.94: 5224,2562 5224,2601

## Text inside footprints (layer, text, board x,y; h text height)
LS1: Top Overlay "+" at 4627.8,4082.43 h70 r90